# Altium PCB SIM800L.PcbDoc
Units mm, origin at the board's own origin, x right, y up, seen from the top; angles counter-clockwise.
Board outline 40 x 35.46 mm, 2 copper layers (Top Layer, Bottom Layer); 46 components, 39 nets, 158 pads, 39 vias.
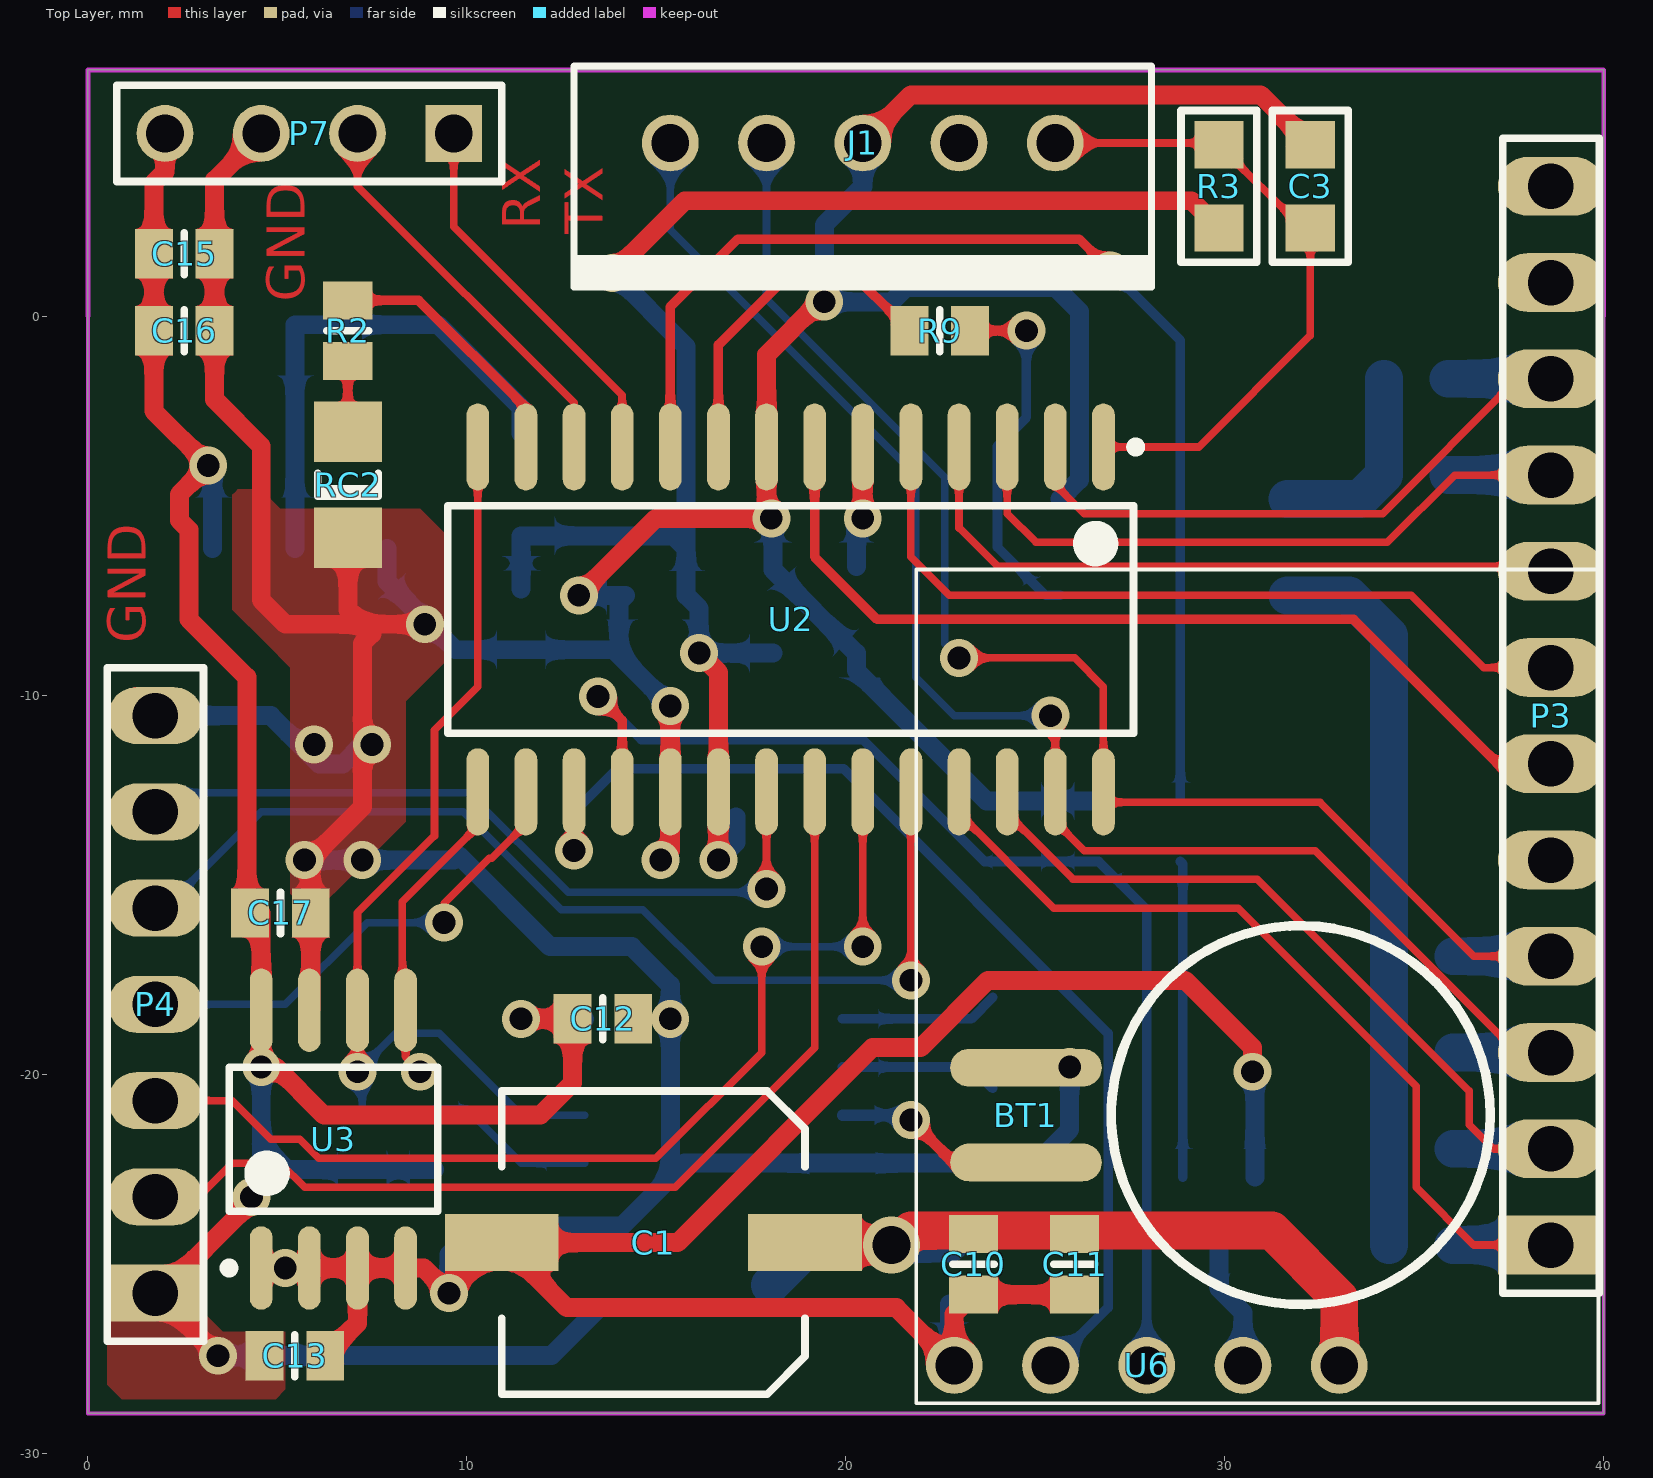
[diagram p0: Top Layer view]
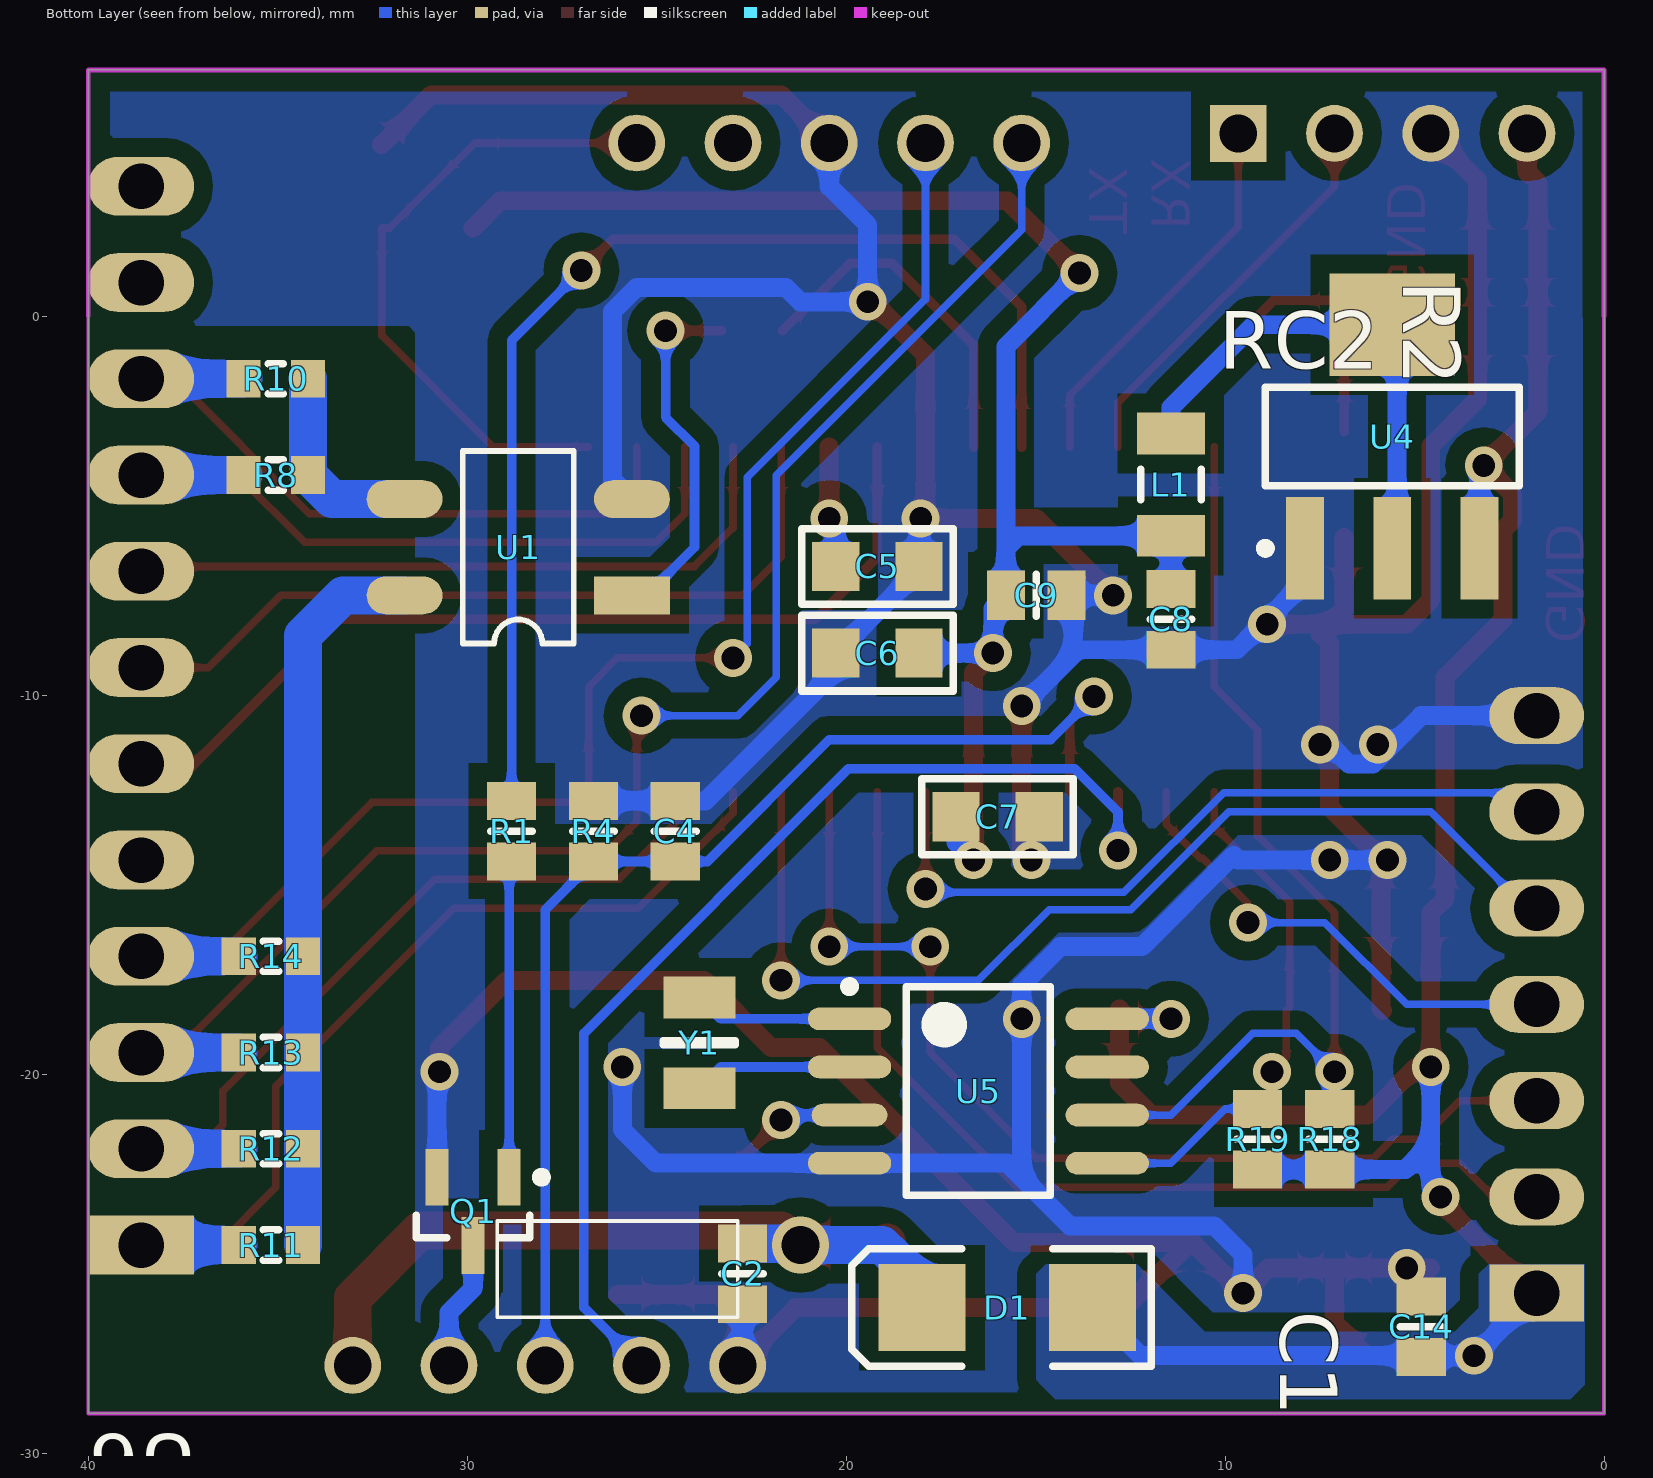
[diagram p1: Bottom Layer view, seen from below]

## Layer stack, top to bottom
Top Solder: solder mask 0.0102, Solder Resist, Dk 3.5
Top Layer: signal copper 0.0356
Dielectric1: dielectric 0.32, FR-4, Dk 4.8
Bottom Layer: signal copper 0.0356
Bottom Solder: solder mask 0.0102, Solder Resist, Dk 3.5

## Board outline
0,6.5 0,-28.956 40,-28.956 40,6.5

## Design rules (kind name [scope] priority, off if disabled: settings)
Clearance [All] p1: gap=0.254
MinimumSolderMaskSliver [All] p1 off: minsoldermaskwidth=0.254
PlaneConnect [All] p1: planeconnectstyle=Direct reliefexpansion=0.508 reliefentries=4 reliefconductorwidth=0.254 reliefairgap=0.254
PolygonConnect [All] p1: connectstyle=Direct reliefconductorwidth=0.254 reliefentries=4 polygonreliefangle="90 Angle" airgapwidth=0.254
RoutingVias [All] p1: holewidth=0.711 width=1.27 viastyle="Through Hole" minholewidth=0.2 minwidth=0.3 maxholewidth=2 maxwidth=3
SilkToSilkClearance [All] p1 off: silktosilkclearance=0.254
SilkToSolderMaskClearance SilkscreenOverComponentPads [IsPad] p1 off: minsilkscreentomaskgap=0.254 clearancetoexposedcopper=TRUE
SolderMaskExpansion [All] p1: expansion=0.102
Width [All] p1: maxlimit=1 minlimit=0.2 preferedwidth=0.254
26 further rules are at their usual default settings.

## Components (designator, comment, footprint, x,y, rotation, side; value= is the part's Value field where it differs from the comment)
BT1 "ML-920S/DN" ML-920S/DN 32.004,-21.082 r180 top
C1 "EEE-FT1A102AP" CAP8x8 10.922,-20.447 r0 top
C2 "LMK212F106ZG-T" RESC2012L 22.733,-25.273 r270 bottom
C3 "Cap Semi" CAPC2013X05N 32.258,3.429 r270 top
C4 "LMK212F106ZG-T" RESC2012L 24.511,-13.589 r90 bottom
C5 "Cap Semi" CAPC2013X05N 19.177,-6.604 r0 bottom
C6 "Cap Semi" CAPC2013X05N 19.177,-8.89 r180 bottom
C7 "Cap Semi" CAPC2013X05N 16.002,-13.208 r0 bottom
C8 "CL21F104ZBCNNNC" RESC2012L 11.43,-8.001 r270 bottom
C9 "LMK212F106ZG-T" RESC2012L 14.986,-7.366 r180 bottom
C10 "LMK212F106ZG-T" RESC2012L 23.368,-25.019 r270 top
C11 "LMK212F106ZG-T" RESC2012L 26.035,-25.019 r270 top
C12 "LMK212F106ZG-T" RESC2012L 13.589,-18.542 r0 top
C13 "CL21F104ZBCNNNC" RESC2012L 5.461,-27.432 r0 top
C14 "LMK212F106ZG-T" RESC2012L 4.826,-26.67 r90 bottom
C15 "CL21F104ZBCNNNC" RESC2012L 2.54,1.651 r0 top
C16 "LMK212F106ZG-T" RESC2012L 2.54,-0.381 r0 top
C17 "LMK212F106ZG-T" RESC2012L 5.08,-15.748 r0 top
D1 "SS34" SMB 15.748,-26.162 r0 bottom
J1 "87224-5" CON5 20.447,4.572 r0 top locked
L1 "1624117-3" INDC3216 11.43,-4.445 r270 bottom
P3 "Header 12" HDR1X12 38.608,-24.511 r90 top
P4 "Header 7" HDR1X7 1.778,-25.781 r90 top
P7 "Header 4" HDR1X4 9.652,4.826 r180 top
Q1 "2PD602ASL,215" SOT23-3L 29.845,-23.622 r270 bottom
R1 "ERJ-6GEYJ331V" RESC2012L 28.829,-13.589 r90 bottom
R2 "ERJ-6GEYJ102V" RESC2012L 6.858,-0.381 r270 top
R3 "Res3" RESC2013X05N 29.845,3.429 r90 top
R4 "ERJ-6GEYJ102V" RESC2012L 26.67,-13.589 r90 bottom
R8 "ERJ-6GEYJ331V" RESC1608N 35.052,-4.191 r180 bottom
R9 "ERJ-6GEYJ331V" RESC2012L 22.479,-0.381 r180 top
R10 "ERJ-6GEYJ331V" RESC1608N 35.052,-1.651 r180 bottom
R11 "ERJ-6GEYJ331V" RESC1608N 35.179,-24.511 r180 bottom
R12 "ERJ-6GEYJ331V" RESC1608N 35.179,-21.971 r180 bottom
R13 "ERJ-6GEYJ331V" RESC1608N 35.179,-19.431 r180 bottom
R14 "ERJ-6GEYJ331V" RESC1608N 35.179,-16.891 r180 bottom
R18 "ERJ-6GEYJ331V" RESC2012L 7.239,-21.717 r270 bottom
R19 "ERJ-6GEYJ331V" RESC2012L 9.144,-21.717 r270 bottom
RC2 "LNJ911W8BRU" CD3216-1206 6.858,-4.445 r270 top
U1 "AQY282SX" SOP4 25.654,-7.366 r0 bottom
U2 "PIC18F24J11-I/SO" SOIC-SO28_N 18.542,-8.001 r270 top locked
U3 "24AA1025T-I/SM" SOIJ-SM8_N#1 6.477,-21.717 r90 top
U4 "AMS1117" SOT223-4M 5.588,-3.175 r90 bottom
U5 "DS1307" SOIJ-SM8_N#2 16.51,-20.447 r0 bottom
U6 "SIM800L" SIM800L 22.86,-27.686 r90 top locked
Y1 "ECS-110-S-5P" ABS07 23.876,-19.177 r270 bottom

## Footprints (in the part's own frame and the unit in brackets; to place one, negate y for a bottom-side part, rotate by r counter-clockwise, add the part's x,y. Pads: shape width x height; smd on the part's side, far side on the other; paste and mask are expansions set on the pad)
ABS07 [mm] "MELF Resistor, 2-Leads, Body 3.2x1.5mm, IPC Medium Density"
  rect 1.1x1.9 smd: 1(-1.2,0) 2(1.2,0)
  silkscreen extent -0.05,-0.95 0.05,0.95, body extent -1.65,-0.8 1.65,0.8, height 1.6
CAP8x8 [mm]
  rect 3x1.5 smd: 1(8,-4) 2(0,-4)
  silkscreen extent 0,-8 8,0
CAPC2013X05N [mm] "Chip Capacitor, 2-Leads, Body 2,0x1,3mm, IPC Medium Density"
  rect 1.25x1.3 smd: 1(-1.1,0) 2(1.1,0)
  silkscreen extent -2,-1 2,1, body extent -1.05,-0.67 1.05,0.68, height 0.5
CD3216-1206 [mm] "Chip Diode; Body 3.2 x 1.6 mm (LxW typ)"
  rect 1.6x1.8 smd: 1(-1.4,0) 2(1.4,0)
  silkscreen extent -0.3,-0.8 0.3,0.8
CON5 [mm]
  round 1.5 hole 1: 1(5.08,0) 2(2.54,0) 3(0,0) 4(-2.54,0) 5(-5.08,0)
  silkscreen extent -7.62,-3.81 7.62,2.03
HDR1X4 [mm] "Connector; Header; 4 Position"
  rect 1.5x1.5 hole 1: 1(0,0)
  round 1.5 hole 1: 2(2.54,0) 3(5.08,0) 4(7.62,0)
  silkscreen extent -1.27,-1.27 8.89,1.27
HDR1X7 [mm] "Connector; Header; 7 Position"
  rect 1.5x2.5 hole 1.2: 1(0,0)
  oval 1.5x2.5 hole 1.2: 2(2.54,0) 3(5.08,0) 4(7.62,0) 5(10.16,0) 6(12.7,0) 7(15.24,0)
  silkscreen extent -1.27,-1.27 16.51,1.27
HDR1X12 [mm] "Connector; Header; 12 Position"
  rect 1.55x2.8 hole 1.2: 1(0,0)
  oval 1.55x2.8 hole 1.2: 2(2.54,0) 3(5.08,0) 4(7.62,0) 5(10.16,0) 6(12.7,0) 7(15.24,0) 8(17.78,0) 9(20.32,0) 10(22.86,0) 11(25.4,0) 12(27.94,0)
  silkscreen extent -1.27,-1.27 29.21,1.27
INDC3216 [mm] "Chip Inductor, Body 3.2x1.6mm, IPC High Density"
  rect 1.1x1.8 smd: 1(-1.35,0) 2(1.35,0)
  silkscreen extent -0.4,-0.8 0.4,0.8, body extent -1.7,-0.9 1.7,0.9, height 0.55
ML-920S/DN [mm]
  oval 4x1 smd mask+0.02: 1(7.25,1.25) 2(7.25,-1.25)
  silkscreen extent -5,-5 5,5
RESC1608N [mm] "Chip Resistor, Body 1.6x0.8mm, IPC Medium Density"
  rect 0.9x1 smd: 1(-0.85,0) 2(0.85,0)
  silkscreen extent -0.2,-0.4 0.2,0.4, body extent -0.85,-0.48 0.85,0.48, height 0.6
RESC2012L [mm] "Chip Resistor, Body 2.0x1.3mm, IPC High Density"
  rect 1x1.3 smd: 1(-0.8,0) 2(0.8,0)
  silkscreen extent 0,-0.55 0,0.55, body extent -1.07,-0.7 1.07,0.7, height 0.65
RESC2013X05N [mm] "Chip Resistor, 2-Leads, Body 2,0x1,3mm, IPC Medium Density"
  rect 1.25x1.3 smd: 1(1.1,0) 2(-1.1,0)
  silkscreen extent -2,-1 2,1, body extent -1.05,-0.68 1.05,0.67, height 0.5
SIM800L [mm]
  round 1.5 hole 1 mask+0.01: 1(0,-10.16) 2(0,-7.62) 3(0,-5.08) 4(0,-2.54) 5(0,0)
  silkscreen extent -1,-17 21,1
SMB [mm] "DO-214-AA/SMB; 2 C-Bend Leads; Body 5.3 x 3.6 mm, inc. leads (LxW)"
  rect 2.3x2.3 smd: 1(-2.25,0) 2(2.25,0)
  silkscreen extent -3.8,-1.55 4.1,1.55
SOIC-SO28_N [mm] "SOIC, 28-Leads, Body 17.9x7.5mm, Pitch 1.27mm, IPC Medium Density"
  oval 2.3x0.6 smd: 1(-4.55,8.255) 2(-4.55,6.985) 3(-4.55,5.715) 4(-4.55,4.445) 5(-4.55,3.175) 6(-4.55,1.905) 7(-4.55,0.635) 8(-4.55,-0.635) 9(-4.55,-1.905) 10(-4.55,-3.175) 11(-4.55,-4.445) 12(-4.55,-5.715) 13(-4.55,-6.985) 14(-4.55,-8.255) 15(4.55,-8.255) 16(4.55,-6.985) 17(4.55,-5.715) 18(4.55,-4.445) 19(4.55,-3.175) 20(4.55,-1.905) 21(4.55,-0.635) 22(4.55,0.635) 23(4.55,1.905) 24(4.55,3.175) 25(4.55,4.445) 26(4.55,5.715) 27(4.55,6.985) 28(4.55,8.255)
  silkscreen extent -4.67,-9.05 3,9.23, body extent -3.8,-9.06 3.8,9.06, height 2.65
SOIJ-SM8_N#1 [mm] "SOP, 8-Leads, Body 5.2x5.2mm, Pitch 1.27mm, IPC Medium Density"
  oval 2.2x0.6 smd: 1(-3.4,1.905) 2(-3.4,0.635) 3(-3.4,-0.635) 4(-3.4,-1.905) 5(3.4,-1.905) 6(3.4,-0.635) 7(3.4,0.635) 8(3.4,1.905)
  silkscreen extent -3.52,-2.75 1.9,2.88, body extent -2.73,-2.75 2.73,2.75, height 2.04
SOIJ-SM8_N#2 [mm] "SOP, 8-Leads, Body 5.2x5.2mm, Pitch 1.27mm, IPC Medium Density"
  oval 2.2x0.6 smd: 1(3.4,-1.905) 2(3.4,-0.635) 4(3.4,1.905) 5(-3.4,1.905) 6(-3.4,0.635) 7(-3.4,-0.635) 8(-3.4,-1.905)
  oval 2x0.6 smd: 3(3.4,0.635)
  silkscreen extent -1.9,-2.88 3.52,2.75, body extent -2.75,-2.73 2.75,2.73, height 2.04
SOP4 [mm]
  rect 2x1 smd: 1(0,0)
  oval 2x1 smd: 2(0,-2.54) 3(6,-2.54) 4(6,0)
  silkscreen extent 1.53,-3.81 4.47,1.27
SOT23-3L [mm] "SOT23, 3-Leads, Body 2.9x1.3mm, Pitch 0.95mm, Lead Span 2.5mm, IPC High Density"
  rect 1.5x0.6 smd: 1(-0.9,0.95) 2(0.9,0) 3(-0.9,-0.95)
  silkscreen extent -1.02,-1.5 0.7,1.92, body extent -0.7,-1.5 0.7,1.5, height 1.1
SOT223-4M [mm] "SOT223, 4-Leads, Body 6.5x3.5mm, Pitch 2.3mm, Lead Span 7mm, IPC Low Density"
  rect 2.7x1 smd: 1(-2.95,2.3) 2(-2.95,0) 3(-2.95,-2.3)
  rect 2.7x3.3 smd: 4(2.95,0)
  silkscreen extent -3.07,-3.35 1.3,3.48, body extent -1.85,-3.35 1.85,3.35, height 1.8

## Part data
BT1: library part Battery, "Multicell Battery"
C1: library part "Cap Pol1", "CAP ALUM 1000UF 10V 20% SMD"
C2 C4 C9 C10 C11 C12 C14 C16 C17: library part Cap, "CAP CER 10UF 10V Y5V 0805"
C3 C5 C6 C7: "Capacitor (Semiconductor SIM Model)"
C8 C13 C15: library part Cap, "CAP CER 0.1UF 50V Y5V 0805"
D1: library part "D Schottky SS34", "DIODE SCHOTTKY 40V 3A SMC"
J1: library part CON5, "CONN HEADER VERT .100 5POS 15AU"
L1: library part Inductor, "FERRITE CHIP 60 OHM 850MA 0805"
P3: "Header, 12-Pin"
P4: "Header, 7-Pin"
P7: "Header, 4-Pin"
Q1: library part NPN, "TRANSISTOR NPN 50V 500MA SOT-23"
R1 R8 R9 R10 R11 R12 R13 R14 R18 R19: library part Res3, "RES 330 OHM 1/8W 5% 0805 SMD"
R2 R4: library part Res3, "RES 1K OHM 1/8W 5% 0805 SMD"
R3: "Resistor"
RC2: library part LEDRED1206, "LED BLUE THRU BOARD 1206"
U1: "RELAY OPTO 60VAC/DC 500MA 4-SOP"
U2: "Low Power, High Performance Microcontroller with nanoWatt XLP Technology, 28-pin SOIC, Industrial Temperature"
U3: "1 Mbit, 400kHz, 1.7V, I2C Serial EEPROM, 8-Pin SOIC 208mil, Industrial Temperature, Tape and Reel"
U4: "Adjustable Precision Shunt Regulator"
Y1: "Crystal Oscillator"

## Via types
v1: diameter 1, hole 0.6, Top Layer to Bottom Layer, 38 vias
v2: diameter 1.5, hole 1, Top Layer to Bottom Layer, 1 vias

## Nets (pads, with @x,y where several pads share a name; then routed paths per layer and width w, separated by ;. In a path a pad name is that pad's centre, name@x,y a point inside that pad or via, vN(x,y) a via of type N, cw(c..) or ccw(c..) an arc to the next point about the centre after c; other vN are vias at no path point)
C0: P3.6 U2.7 | length 24.6
  Top Layer w0.254: U2.7 19.177,-6.35 20.828,-8.001 33.401,-8.001 37.211,-11.811 P3.6
C1: P3.7 U2.5 | length 21
  Top Layer w0.2: U2.5 21.717,-6.35 22.733,-7.366 34.925,-7.366 36.83,-9.271 P3.7
C2: P3.8 U2.4 | length 18.2
  Top Layer w0.2: U2.4 22.987,-5.588 24.003,-6.604 38.481,-6.604 P3.8
C3: P3.9 R8.1 U2.3 | length 19.9
  Top Layer w0.2: U2.3 24.257,-5.207 25.019,-5.969 34.29,-5.969 36.068,-4.191 P3.9
  Bottom Layer w1: R8.1 P3.9
C4: P3.10 R10.1 U2.2 | length 18.6
  Top Layer w0.2: U2.2 25.527,-4.445 26.289,-5.207 34.163,-5.207 37.719,-1.651 P3.10
  Bottom Layer w1: R10.1 P3.10
CLK1: P4.3 U2.23 | length 27.3
  Top Layer w0.2: P4.3 3.81,-20.701 4.826,-21.717 5.588,-21.717 6.096,-22.225 14.986,-22.225 17.78,-19.431 v1(17.78,-16.637) ; v1(20.447,-16.637) U2.23
  Bottom Layer w0.2: v1(17.78,-16.637) v1(20.447,-16.637)
CLK2: P4.5 U2.24 | length 27.8
  Top Layer w0.2: P4.5 P4.5@1.797,-15.64 ; v1(21.717,-17.526) U2.24
  Bottom Layer w0.2: P4.5 2.032,-15.621 4.572,-13.081 9.906,-13.081 12.484,-15.659 14.643,-15.659 16.51,-17.526 v1(21.717,-17.526)
CX: R8.2 R10.2 U1.3 | length 5.4
  Bottom Layer w1: U1.3 33.567,-4.826 R8.2 R10.2
DAT1: P4.2 U2.22 | length 26.3
  Top Layer w0.2: P4.2 2.921,-23.241 3.81,-22.352 5.08,-22.352 5.715,-22.987 15.494,-22.987 19.177,-19.304 U2.22
DAT2: P4.4 U2.16 | length 12.9
  Top Layer w0.2: v1(9.398,-16.002) 9.398,-15.494 10.591,-14.301 10.66,-14.301 11.557,-13.404 U2.16
  Bottom Layer w0.2: P4.4 5.207,-18.161 7.366,-16.002 v1(9.398,-16.002)
GND: BT1.2 C1.2 C2.2 C3.1 C4.2 C5.1 C6.1 C7.1 C8.2 C9.2 C10.2 C11.2 C12.2 C13.2 C14.2 C15.2 C16.2 C17.2 J1.3 P4.7 P7.3 Q1.3 R4.2 RC2.2 U1.2 U2.8 U2.19 U3.1 U3.2 U3.3 U3.4 U3.7 U4.1 U5.4 U6.5 | length 203.3
  Top Layer w0.5: P4.7@1.27,-10.033 P4.7 ; U3.1 U3.2 U3.3 ; P7.3 3.34,3.594 C15.2 C16.2 3.34,-2.197 4.572,-3.429 4.572,-7.493 5.207,-8.128 7.239,-8.128 ; U3.7 5.88,-18.279 C17.2 5.88,-14.313 7.239,-12.954 7.239,-8.636 7.493,-8.382 7.239,-8.128 ; C13.2 7.112,-26.581 U3.3 ; RC2.2 6.858,-7.747 7.239,-8.128 ; v1(8.89,-8.128) 7.239,-8.128 ; v1(12.954,-7.366) 14.986,-5.334 v1(18.034,-5.334) 17.907,-5.207 U2.8 17.907,-1.016 19.304,0.381 v1(19.431,0.381) ; v1(15.113,-14.351) 15.367,-14.097 U2.19 v1(15.367,-10.287) ; J1.3 21.717,5.842 30.945,5.842 C3.1 ; C11.2 C10.2 22.86,-26.327 U6.5 21.336,-26.162 12.637,-26.162 C1.2 ; v1(30.734,-19.939) 30.734,-19.304 28.956,-17.526 23.749,-17.526 21.971,-19.304 20.701,-19.304 15.558,-24.447 C1.2 ; U3.3 U3.4 8.861,-25.117 v1(9.525,-25.781) 10.859,-24.447 C1.2
  Bottom Layer w0.5: P4.7 4.826,-10.541 6.096,-11.811 6.731,-11.811 7.239,-11.303 v1(7.493,-11.303) ; v1(5.715,-14.351) 9.652,-14.351 9.779,-14.224 12.192,-16.637 14.351,-16.637 15.367,-17.653 v1(15.367,-18.542) 15.367,-22.733 ; U4.1 7.888,-6.999 9.69,-8.801 C8.2 13.881,-8.801 14.008,-8.928 ; v1(9.525,-25.781) 9.525,-24.765 10.287,-24.003 14.097,-24.003 15.367,-22.733 ; v1(12.954,-7.366) C9.2 14.008,-7.544 14.008,-8.928 ; v1(15.367,-10.287) 14.008,-8.928 ; v1(18.034,-5.334) 18.077,-5.377 C5.1 18.077,-6.69 C6.1 20.277,-9.355 23.711,-12.789 C4.2 R4.2 ; J1.3 20.447,3.429 19.431,2.413 v1(19.431,0.381) 21.209,0.381 21.59,0.762 25.527,0.762 26.162,0.127 26.162,-4.318 U1.2 ; C2.2 22.733,-27.559 U6.5 ; v1(25.908,-19.812) 25.908,-21.463 25.019,-22.352 U5.4 15.748,-22.352 15.367,-22.733 ; Q1.3 v1@30.795,-19.873
  other v1: 5.207,-25.117 7.239,-14.351 5.969,-11.303
MCU_RXD0: C4.1 R4.1 U2.18 U6.3 | length 31.6
  Top Layer w0.254: v1(13.462,-10.033) 14.097,-10.668 U2.18
  Bottom Layer w0.254: v1(13.462,-10.033) 14.605,-11.176 20.447,-11.176 23.66,-14.389 C4.1 R4.1 27.94,-15.659 U6.3
MCU_TXD0: U2.17 U6.4 | length 29.4
  Top Layer w0.254: v1(12.827,-14.097) U2.17
  Bottom Layer w0.254: v1(12.827,-14.097) 12.827,-13.081 13.97,-11.938 19.939,-11.938 26.924,-18.923 26.924,-26.162 U6.4
NetBT1_1: BT1.1 U5.3 | length 5.4
  Top Layer w0.3: v1(21.717,-21.209) 22.84,-22.332 BT1.1
  Bottom Layer w0.3: U5.3 21.59,-21.082 v1(21.717,-21.209)
NetC5_2: C5.2 U2.6 | length 3.2
  Top Layer w0.5: v1(20.447,-5.334) U2.6
  Bottom Layer w0.5: C5.2 20.277,-5.504 v1(20.447,-5.334)
NetL1_1: L1.1 U4.2 U4.4 | length 13.5
  Bottom Layer w0.5: U4.2@5.461,-6.125 5.461,-0.225 9.242,-0.225 11.43,-2.413 L1.1
NetQ1_1: Q1.1 R1.1 | length 8.4
  Bottom Layer w0.254: R1.1 28.895,-14.455 Q1.1
NetQ1_2: Q1.2 U6.2 | length 3.4
  Bottom Layer w0.5: Q1.2 29.845,-25.654 30.48,-26.289 U6.2
NetR2_2: R2.2 RC2.1 | length 1.9
  Top Layer w0.254: RC2.1 R2.2
NetR9_1: R9.1 U1.1 | length 9.7
  Top Layer w0.254: R9.1 v1(24.765,-0.381)
  Bottom Layer w0.254: v1(24.765,-0.381) 24.765,-2.667 24.003,-3.429 24.003,-6.096 25.273,-7.366 U1.1
NetU5_1: U5.1 Y1.1 | length 4.2
  Bottom Layer w0.254: U5.1 23.311,-18.542 Y1.1
NetU5_2: U5.2 Y1.2 | length 4.2
  Bottom Layer w0.254: U5.2 23.311,-19.812 Y1.2
PGC: J1.5 P3.3 R13.1 U2.27 | length 41.8
  Top Layer w0.2: v1(25.4,-10.541) 25.527,-10.668 U2.27 25.527,-13.335 26.293,-14.101 32.389,-14.101 37.719,-19.431 P3.3
  Bottom Layer w0.2: J1.5 15.367,2.286 21.844,-4.191 21.844,-9.525 22.86,-10.541 v1(25.4,-10.541)
  Bottom Layer w1: R13.1 P3.3
PGD: J1.4 P3.4 R14.1 U2.28 | length 38.5
  Top Layer w0.2: v1(22.987,-9.017) 26.035,-9.017 26.797,-9.779 U2.28 27.073,-12.827 32.512,-12.827 36.576,-16.891 P3.4
  Bottom Layer w0.2: J1.4@17.907,4.318 17.907,0.453 22.606,-4.246 22.606,-8.636 v1(22.987,-9.017)
  Bottom Layer w1: R14.1 P3.4
PRE: P4.6 U2.21 | length 20.7
  Top Layer w0.2: P4.6 P4.6@2.413,-13.081 ; v1(17.907,-15.113) U2.21
  Bottom Layer w0.2: P4.6 2.286,-12.573 10.04,-12.573 12.672,-15.205 17.815,-15.205 v1(17.907,-15.113)
R0: P3.1 R11.1 U2.25 | length 25.1
  Top Layer w0.2: U2.25 22.987,-13.121 25.487,-15.621 30.353,-15.621 35.052,-20.32 35.052,-22.987 36.576,-24.511 P3.1
  Bottom Layer w1: R11.1 P3.1
R1: P3.2 R12.1 U2.26 | length 21.7
  Top Layer w0.2: U2.26 24.257,-13.121 25.995,-14.859 30.861,-14.859 36.449,-20.447 36.449,-21.336 37.084,-21.971 P3.2
  Bottom Layer w1: R12.1 P3.2
RC2: R2.1 U2.13 | length 6.9
  Top Layer w0.254: R2.1 8.725,0.419 11.557,-2.413 U2.13
RLKA: R9.2 U2.9 | length 9.4
  Top Layer w0.254: U2.9 16.637,-0.754 18.788,1.397 19.901,1.397 R9.2
RST: C3.2 J1.1 R3.1 U2.1 | length 17.2
  Top Layer w0.2: J1.1 29.802,4.572 R3.1 32.045,2.329 C3.2 32.258,-0.508 29.315,-3.451 U2.1
RX: P7.2 U2.12 | length 10.6
  Top Layer w0.2: P7.2 7.112,3.429 12.827,-2.286 U2.12
RXX: R11.2 R12.2 R13.2 R14.2 U1.4 | length 19.2
  Bottom Layer w1: U1.4 33.274,-7.366 34.329,-8.421 R14.2 R13.2 R12.2 R11.2
SCL: R18.1 U2.14 U3.6 U5.6 | length 26.1
  Top Layer w0.2: v1(7.112,-19.939) U3.6 7.112,-15.748 9.144,-13.716 9.144,-10.922 10.287,-9.779 U2.14
  Bottom Layer w0.2: R18.1 7.239,-20.066 v1(7.112,-19.939) 8.128,-18.923 9.271,-18.923 11.43,-21.082 U5.6
SDA: R19.1 U2.15 U3.5 U5.5 | length 13
  Top Layer w0.2: v1(8.763,-19.939) 8.382,-19.558 U3.5 8.298,-18.233 8.298,-15.451 10.287,-13.462 U2.15
  Bottom Layer w0.2: R19.1 9.995,-20.917 11.43,-22.352 U5.5
SIMRST: R1.2 U2.10 | length 31.2
  Top Layer w0.254: U2.10 15.367,0.254 17.145,2.032 26.162,2.032 v1(26.987,1.206)
  Bottom Layer w0.254: v1(26.987,1.206) 28.829,-0.635 R1.2
TX: P7.1 U2.11 | length 10.1
  Top Layer w0.2: P7.1 9.652,2.358 14.097,-2.087 U2.11
VCC: C12.1 C13.1 C14.1 C15.1 C16.1 C17.1 D1.1 P4.1 P7.4 R18.2 R19.2 U3.8 U4.3 U5.8 | length 70.3
  Top Layer w0.5: P7.4 2.032,3.81 1.74,3.518 C15.1 C16.1 1.74,-2.502 v1(3.175,-3.937) 2.413,-4.699 2.413,-5.384 2.663,-5.634 2.663,-7.997 4.191,-9.525 4.191,-15.367 4.572,-15.748 U3.8 v1(4.572,-19.812) 4.953,-19.812 6.223,-21.082 11.938,-21.082 12.789,-20.231 12.789,-18.288 12.535,-18.542 v1(11.43,-18.542) ; v1(3.429,-27.432) P4.1 1.905,-25.781 4.318,-23.368 v1(4.318,-23.241)
  Bottom Layer w0.5: P4.1 v1(3.429,-27.432) 12.228,-27.432 D1.1 ; v1(3.175,-3.937) 3.288,-4.05 U4.3 ; v1(4.318,-23.241) 4.572,-22.987 4.572,-21.844 ; v1(4.572,-19.812) 4.572,-21.844 ; R19.2 R18.2 5.245,-22.517 4.572,-21.844 ; v1(11.43,-18.542) U5.8
VCC_MCU: C6.2 C7.2 C8.1 C9.1 L1.2 R3.2 U2.20 | length 43.1
  Top Layer w0.5: v1(13.843,1.143) 15.748,3.048 29.126,3.048 R3.2 ; v1(16.129,-8.89) 16.637,-9.398 U2.20 v1(16.637,-14.351)
  Bottom Layer w0.5: C8.1 L1.2 15.447,-5.795 15.786,-6.134 ; v1@13.716,1.27 v1(13.843,1.143) 15.786,-0.8 15.786,-6.134 ; v1(16.637,-14.351) 17.102,-13.886 C7.2 ; C6.2 v1(16.129,-8.89) 16.129,-7.709 C9.1 15.786,-6.134
VSIM: C1.1 C2.1 C10.1 C11.1 D1.2 U6.1 | length 25
  Top Layer w0.5: C1.1 v2@21.145,-24.447 ; v2(21.209,-24.511) v2@21.463,-24.511
  Top Layer w1: C1.1 18.986,-24.511 v2(21.209,-24.511) ; v2@21.209,-24.447 21.399,-24.447 21.716,-24.13 31.242,-24.13 33.02,-25.908 U6.1
  Bottom Layer w0.5: D1.2 D1.2@17.998,-25.563 ; v2(21.209,-24.511) v2@21.247,-24.473
  Bottom Layer w1: D1.2@17.998,-25.563 19.05,-24.511 v2(21.209,-24.511) ; v2@21.247,-24.473 C2.1
pads on no net: J1.2 P3.5 P3.11 P3.12 U5.7

## Polygon pours and split planes (outlines as drawn)
GND on Top Layer "Bottom Layer-No Net" (solid, pour order 8): 9.398,-8.89 9.398,-7.366 9.398,-5.715 8.763,-5.08 7.112,-5.08 5.08,-5.08 4.572,-4.572 4.064,-4.572 3.937,-4.572 3.81,-4.699 3.81,-5.334 3.81,-7.747 4.699,-8.636 5.334,-9.271 5.334,-12.827 5.334,-15.24 5.588,-15.494 6.096,-15.494 6.223,-15.494 6.731,-14.986 8.382,-13.335 8.382,-11.43 8.382,-10.16 9.398,-9.144
VCC on Top Layer "Bottom Layer-No Net" (solid, pour order 2): 5.207,-26.797 3.556,-26.797 3.302,-26.543 2.54,-25.781 1.778,-25.781 1.016,-25.781 0.635,-26.162 0.508,-26.289 0.508,-26.67 0.508,-28.194 0.889,-28.575 1.651,-28.575 4.953,-28.575 5.207,-28.321
GND on Bottom Layer "Bottom Layer-No Net" (solid, pour order 6): 0,6.5 0,-28.956 40,-28.956 40.005,-28.951 40.005,6.495 40,6.5
VCC on Bottom Layer "Bottom Layer-No Net" (solid, pour order 4): 0.508,-25.019 0.508,-28.194 0.889,-28.575 4.064,-28.575 14.478,-28.575 14.859,-28.194 14.986,-28.067 14.986,-27.432 14.986,-25.273 14.732,-25.019 14.224,-25.019 12.319,-25.019 11.049,-26.289 10.541,-26.797 9.144,-26.797 3.937,-26.797 3.556,-26.416 3.302,-26.162 3.302,-25.4 3.302,-25.273 3.048,-25.019

## Keep-outs
Keep-Out Layer:
  lines w0.1: 0,0 0,-28.956 40,-28.956 40,0
  lines w0.127: 0,0 0,6.5 40,6.5 40,0

## Other copper
Top Layer:
  text "RX" at 11.938,2.286 h1 r90
  text "TX" at 13.589,2.159 h1 r90
  text "GND" at 5.715,0.381 h1 r90
  text "GND" at 1.524,-8.636 h1 r90
Bottom Layer:
  pour cut-out: 31.369,-0.43 31.545,-0.254 40.005,-0.254 40.005,-28.951 40,-28.956 31.369,-28.956

## Silkscreen, mask and mechanical layers (free items; w line width, h text height)
Bottom Overlay:
  lines w0.1: 22.86,-26.416 29.21,-26.416 29.21,-23.876 22.86,-23.876 22.86,-26.416
Mechanical 13:
  lines w0.1: 0,0 40,0